# Altium PCB HandlebarTouchFPCB_LEFT_v1.2.PcbDoc
Units mm, origin at the board's own origin, x right, y up, seen from the top; angles counter-clockwise.
Board outline 211.72 x 83.52 mm, 2 copper layers (Top Layer, Bottom Layer); 5 components, 10 nets, 28 pads, 29 vias.
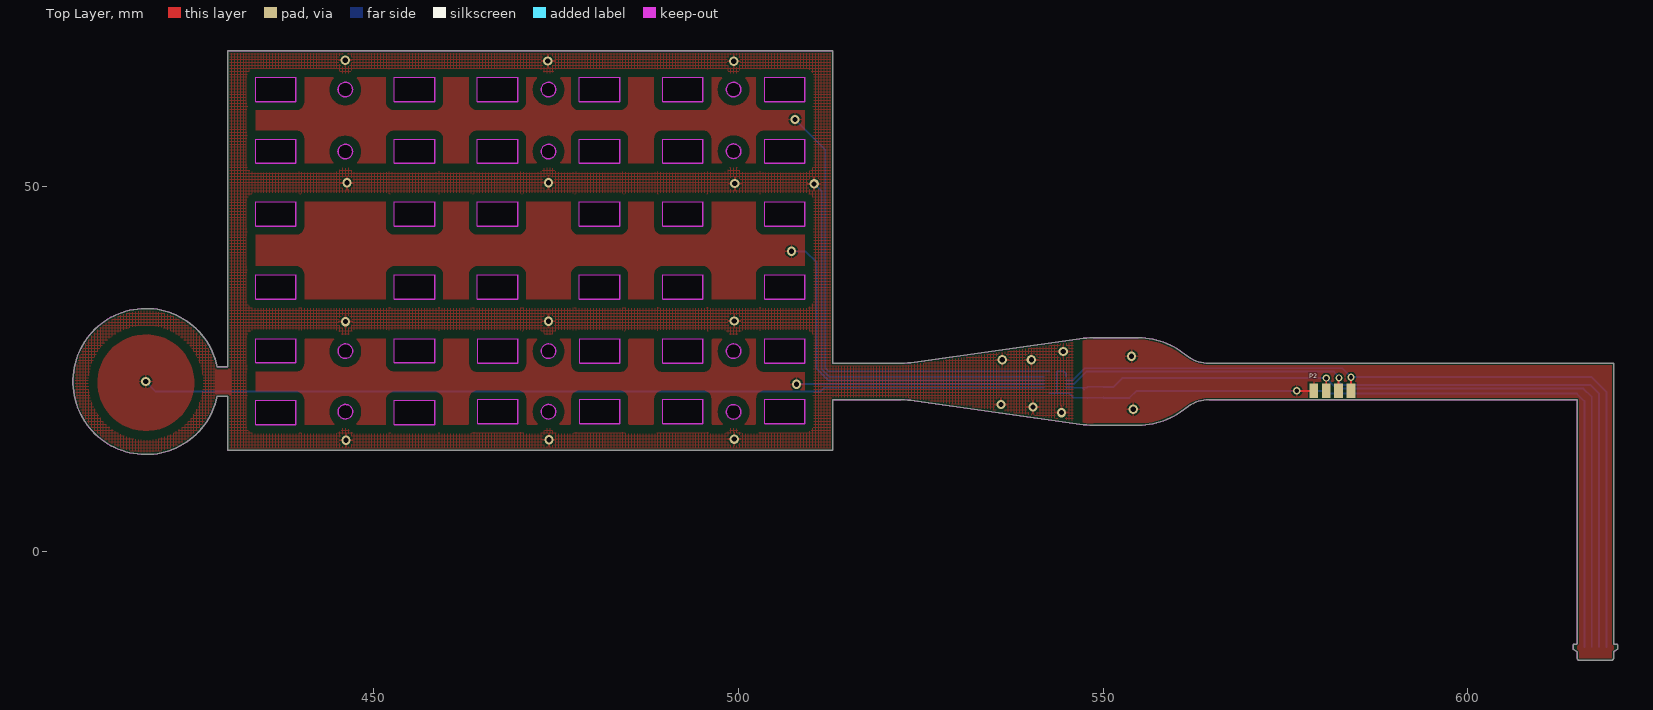
[diagram p0: Top Layer view]
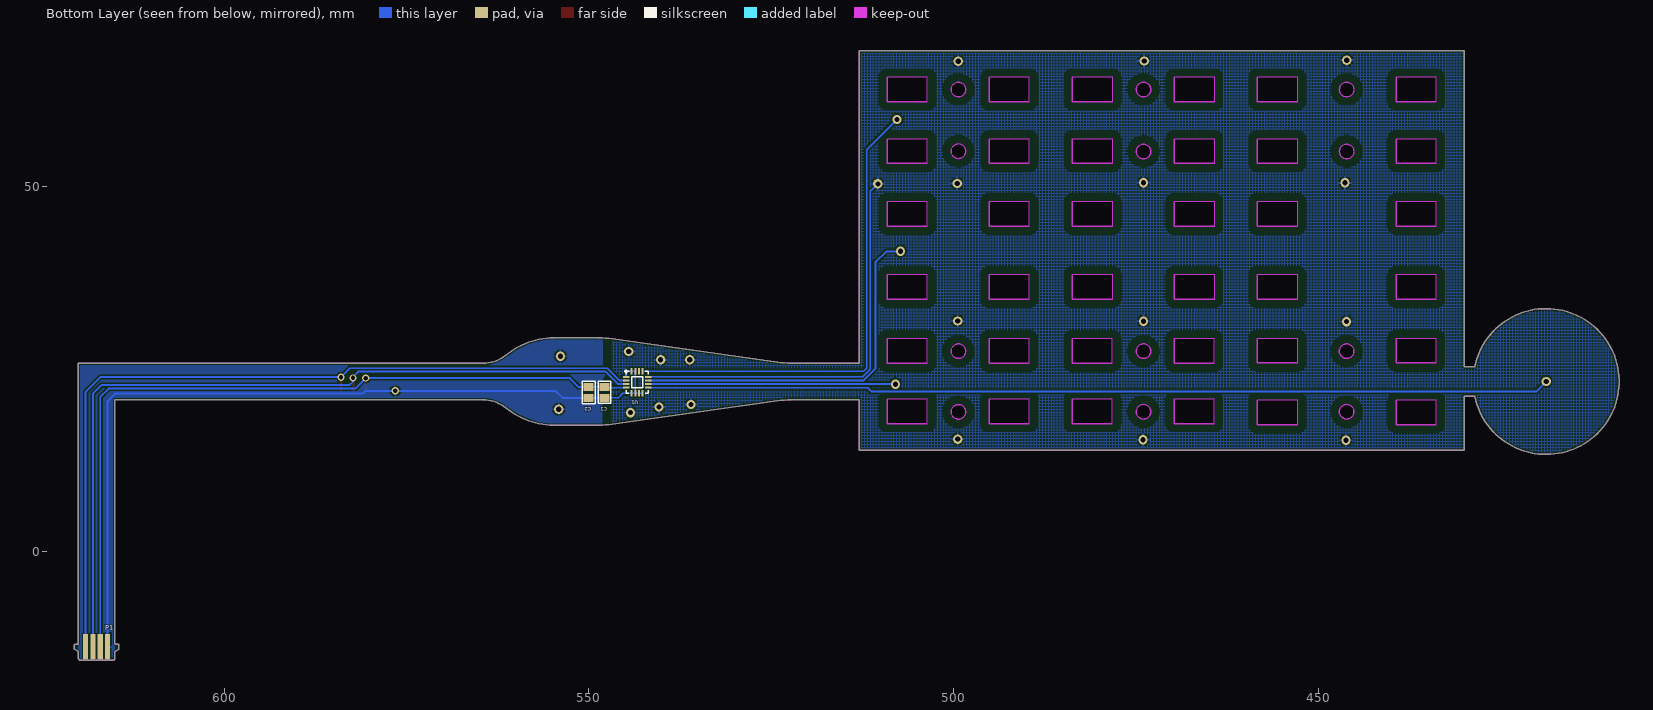
[diagram p1: Bottom Layer view, seen from below]

## Layer stack, top to bottom
Top Solder: solder mask 0.0102, Solder Resist, Dk 3.5
Top Layer: signal copper 0.0356
Dielectric 1: dielectric 0.32, FR-4, Dk 4.8
Bottom Layer: signal copper 0.0356
Bottom Solder: solder mask 0.0102, Solder Resist, Dk 3.5

## Board outline
619.963,-14.605 619.963,-13.805 cw(c620.113,-13.805) 620.039,-13.675 620.513,-13.405 620.513,-12.855 ccw(c620.363,-12.855) 620.363,-12.705 620.113,-12.705 cw(c620.113,-12.555) 619.963,-12.555 619.963,25.806 564.539,25.806 cw(c564.539,30.806) 561.672,26.71 560.546,27.498 ccw(c554.811,19.306) 554.811,29.306 548.66,29.306 ccw(c548.66,19.306) 547.273,29.209 523.653,25.902 cw(c522.267,35.806) 522.267,25.806 512.963,25.806 512.963,68.618 429.989,68.618 429.989,25.306 428.587,25.306 ccw(c418.789,23.306) 428.587,21.306 429.989,21.306 429.989,13.866 512.963,13.855 512.963,20.806 522.267,20.806 cw(c522.267,10.806) 523.653,20.709 547.273,17.402 ccw(c548.66,27.306) 548.66,17.306 554.811,17.306 ccw(c554.811,27.306) 560.546,19.113 561.672,19.902 cw(c564.539,15.806) 564.539,20.806 614.963,20.806 614.963,-12.555 cw(c614.813,-12.555) 614.813,-12.705 614.563,-12.705 ccw(c614.563,-12.855) 614.413,-12.855 614.413,-13.405 614.887,-13.675 cw(c614.813,-13.805) 614.963,-13.805 614.963,-14.605 ccw(c615.263,-14.605) 615.263,-14.905 619.663,-14.905 ccw(c619.663,-14.605)
cut-out: 500.349,19.145 cw(c499.349,19.145) 499.349,18.145 cw(c499.349,19.145) 498.349,19.145 cw(c499.349,19.145) 499.349,20.145 cw(c499.349,19.145)
cut-out: 500.349,27.465 cw(c499.349,27.465) 499.349,26.465 cw(c499.349,27.465) 498.349,27.465 cw(c499.349,27.465) 499.349,28.465 cw(c499.349,27.465)
cut-out: 500.349,54.867 cw(c499.349,54.867) 499.349,53.867 cw(c499.349,54.867) 498.349,54.867 cw(c499.349,54.867) 499.349,55.867 cw(c499.349,54.867)
cut-out: 500.349,63.324 cw(c499.349,63.324) 499.349,62.324 cw(c499.349,63.324) 498.349,63.324 cw(c499.349,63.324) 499.349,64.324 cw(c499.349,63.324)
cut-out: 474.982,19.163 cw(c473.982,19.163) 473.982,18.163 cw(c473.982,19.163) 472.982,19.163 cw(c473.982,19.163) 473.982,20.163 cw(c473.982,19.163)
cut-out: 474.982,27.465 cw(c473.982,27.465) 473.982,26.465 cw(c473.982,27.465) 472.982,27.465 cw(c473.982,27.465) 473.982,28.465 cw(c473.982,27.465)
cut-out: 474.982,54.826 cw(c473.982,54.826) 473.982,53.826 cw(c473.982,54.826) 472.982,54.826 cw(c473.982,54.826) 473.982,55.826 cw(c473.982,54.826)
cut-out: 474.982,63.324 cw(c473.982,63.324) 473.982,62.324 cw(c473.982,63.324) 472.982,63.324 cw(c473.982,63.324) 473.982,64.324 cw(c473.982,63.324)
cut-out: 447.132,19.163 cw(c446.132,19.163) 446.132,18.163 cw(c446.132,19.163) 445.132,19.163 cw(c446.132,19.163) 446.132,20.163 cw(c446.132,19.163)
cut-out: 447.132,27.465 cw(c446.132,27.465) 446.132,26.465 cw(c446.132,27.465) 445.132,27.465 cw(c446.132,27.465) 446.132,28.465 cw(c446.132,27.465)
cut-out: 447.126,54.826 cw(c446.126,54.826) 446.126,53.826 cw(c446.126,54.826) 445.126,54.826 cw(c446.126,54.826) 446.126,55.826 cw(c446.126,54.826)
cut-out: 447.126,63.324 cw(c446.126,63.324) 446.126,62.324 cw(c446.126,63.324) 445.126,63.324 cw(c446.126,63.324) 446.126,64.324 cw(c446.126,63.324)
cut-out: 509.102,17.527 503.602,17.527 503.602,20.882 509.102,20.882
cut-out: 509.102,25.787 503.602,25.787 503.602,29.142 509.102,29.142
cut-out: 509.084,34.6 503.584,34.6 503.584,37.927 509.084,37.927
cut-out: 509.084,44.6 503.584,44.6 503.584,47.927 509.084,47.927
cut-out: 509.084,53.2 503.584,53.2 503.584,56.527 509.084,56.527
cut-out: 509.084,61.66 503.584,61.66 503.584,64.987 509.084,64.987
cut-out: 495.143,17.527 489.643,17.527 489.643,20.882 495.143,20.882
cut-out: 495.143,25.787 489.643,25.787 489.643,29.142 495.143,29.142
cut-out: 495.114,34.6 489.614,34.6 489.614,37.927 495.114,37.927
cut-out: 495.114,44.6 489.614,44.6 489.614,47.927 495.114,47.927
cut-out: 495.114,53.2 489.614,53.2 489.614,56.527 495.114,56.527
cut-out: 495.114,61.66 489.614,61.66 489.614,64.987 495.114,64.987
cut-out: 483.732,17.527 478.232,17.527 478.232,20.882 483.732,20.882
cut-out: 483.732,25.787 478.232,25.787 478.232,29.142 483.732,29.142
cut-out: 483.714,34.6 478.214,34.6 478.214,37.927 483.714,37.927
cut-out: 483.714,44.6 478.214,44.6 478.214,47.927 483.714,47.927
cut-out: 483.714,53.2 478.214,53.2 478.214,56.527 483.714,56.527
cut-out: 483.714,61.66 478.214,61.66 478.214,64.987 483.714,64.987
cut-out: 469.773,17.527 464.273,17.527 464.273,20.882 469.773,20.882
cut-out: 469.773,25.787 464.273,25.787 464.273,29.142 469.773,29.142
cut-out: 469.744,34.6 464.244,34.6 464.244,37.927 469.744,37.927
cut-out: 469.744,44.6 464.244,44.6 464.244,47.927 469.744,47.927
cut-out: 469.744,53.2 464.244,53.2 464.244,56.527 469.744,56.527
cut-out: 469.744,61.66 464.244,61.66 464.244,64.987 469.744,64.987
cut-out: 458.364,17.4 452.864,17.4 452.864,20.727 458.364,20.727
cut-out: 458.364,25.86 452.864,25.86 452.864,29.187 458.364,29.187
cut-out: 458.364,34.6 452.864,34.6 452.864,37.927 458.364,37.927
cut-out: 458.364,44.6 452.864,44.6 452.864,47.927 458.364,47.927
cut-out: 458.364,53.2 452.864,53.2 452.864,56.527 458.364,56.527
cut-out: 458.364,61.66 452.864,61.66 452.864,64.987 458.364,64.987
cut-out: 439.344,17.4 433.844,17.4 433.844,20.727 439.344,20.727
cut-out: 439.344,25.86 433.844,25.86 433.844,29.187 439.344,29.187
cut-out: 439.344,34.6 433.844,34.6 433.844,37.927 439.344,37.927
cut-out: 439.344,44.6 433.844,44.6 433.844,47.927 439.344,47.927
cut-out: 439.344,53.2 433.844,53.2 433.844,56.527 439.344,56.527
cut-out: 439.344,61.66 433.844,61.66 433.844,64.987 439.344,64.987

## Design rules (kind name [scope] priority, off if disabled: settings)
Clearance Clearance_connector [InComponent('P1') vs OnLayer('Keep-Out Layer')] p1: gap=0 ignorepadtopadclearanceinfootprint=FALSE
Clearance [All] p2: gap=0.254 ignorepadtopadclearanceinfootprint=FALSE except(0: Arc-Hole Track-Hole SMDPad-Hole THPad-Hole Via-Hole Fill-Hole Poly-Hole Region-Hole Text-Hole; 0.203: Arc-Arc Arc-Track Arc-SMDPad Track-Track Track-SMDPad SMDPad-SMDPad SMDPad-THPad SMDPad-Via SMDPad-Fill SMDPad-Poly SMDPad-Region SMDPad-Text; 1.2: Fill-Fill Fill-Poly Fill-Region Poly-Poly Poly-Region Region-Region)
PolygonConnect [All] p1: connectstyle=Relief reliefconductorwidth=0.254 reliefentries=4 polygonreliefangle="90 Angle" airgapwidth=0.254
RoutingVias [All] p1: holewidth=0.711 width=1.27 viastyle="Through Hole" minholewidth=0.711 minwidth=1.27 maxholewidth=0.711 maxwidth=1.27
SolderMaskExpansion [All] p1: expansion=0.102
Width [All] p1: maxlimit=0.254 minlimit=0.254 preferedwidth=0.254
30 further rules are at their usual default settings.

## Components (designator, comment, footprint, x,y, rotation, side; value= is the part's Value field where it differs from the comment)
C1 "Cap" "CAP 0805 b" 547.853,21.819 r90 bottom value=0.1uF
C2 "Cap" "CAP 0805 b" 550.037,21.793 r90 bottom value=1uF
P1 "Header 4" FPCB_4_CONNECTOR 615.963,-13.067 r0 bottom
P2 "Header 4" 4PAD_CONNECTOR_SHORT 578.87,22.047 r0 top
U1 "CAP1298" "QFN-COL 16 (3x3)  V2" 543.382,23.204 r180 bottom

## Footprints (in the part's own frame and the unit in brackets; to place one, negate y for a bottom-side part, rotate by r counter-clockwise, add the part's x,y. Pads: shape width x height; smd on the part's side, far side on the other; paste and mask are expansions set on the pad)
4PAD_CONNECTOR_SHORT [mm]
  rect 1.2x2 smd: 1(0,0) 2(1.7,0) 3(3.4,0) 4(5.1,0)
"CAP 0805 b" [mm] "Chip Capacitor, Body 2.0x1.3mm, IPC High Density"
  rect 1.1x1.4 smd: 1(-0.75,0) 2(0.75,0)
  silkscreen extent -1.52,-0.89 1.52,0.89, body extent -1.03,-0.65 0.97,0.66, height 0.73
FPCB_4_CONNECTOR [mm]
  rect 0.7x3.5 smd: 1(0,0) 2(1,0) 3(2,0) 4(3,0)
"QFN-COL 16 (3x3)  V2" [mm] "PQFN, 16-Leads, Body 3.5x3.5mm, Pitch 0.5mm, NSC Recommended"
  rect 0.9x0.28 smd mask+0.051: 1(-1.5,0.75) 2(-1.5,0.25) 3(-1.5,-0.25) 4(-1.5,-0.75) 9(1.5,-0.75) 10(1.5,-0.25) 11(1.5,0.25) 12(1.5,0.75)
  rect 0.28x0.9 smd mask+0.051: 5(-0.75,-1.5) 6(-0.25,-1.5) 7(0.25,-1.5) 8(0.75,-1.5) 13(0.75,1.5) 14(0.25,1.5) 15(-0.25,1.5) 16(-0.75,1.5)
  silkscreen extent -1.65,-1.5 1.5,1.65, body extent -1.52,-1.52 1.52,1.52, height 1.1

## Part data
C1: library part "Cap Semi", "YAGEO (PHYCOMP)  CC0805KRX7R8BB104  COND, CERÁ MULT, X7R, 100NF, 25V, 0805", Supplier Part Number 1=644249, LatestRevisionDate=29-May-2009, LatestRevisionNote="IPC-7351 Footprint Added.", PackageDescription="Chip Capacitor", PackageReference=C1206, Published=8-Jun-2000, Publisher="Altium Limited", Supplier 1=Farnell
C2: library part "Cap Semi", "TAIYO YUDEN  TMK212BJ105KG-T  COND, CERÁ MULT, X5R, 1UF, 25V, 0805", Supplier Part Number 1=2112855, LatestRevisionDate=29-May-2009, LatestRevisionNote="IPC-7351 Footprint Added.", PackageDescription="Chip Capacitor", PackageReference=C1206, Published=8-Jun-2000, Publisher="Altium Limited", Supplier 1=Farnell
P1 P2: "Header, 4-Pin", LatestRevisionDate=17-Jul-2002, LatestRevisionNote="Re-released for DXP Platform.", Publisher="Altium Limited"
U1: Supplier Part Number 1=2373292, Supplier 1=Farnell

## Via types
v1: diameter 1.27, hole 0.711, Top Layer to Bottom Layer, 25 vias
v2: diameter 1, hole 0.6, Top Layer to Bottom Layer, 4 vias

## Nets (pads, with @x,y where several pads share a name; then routed paths per layer and width w, separated by ;. In a path a pad name is that pad's centre, name@x,y a point inside that pad or via, vN(x,y) a via of type N, cw(c..) or ccw(c..) an arc to the next point about the centre after c; other vN are vias at no path point)
5V: C1.2 C2.2 P1.2 P2.2 U1.4 | length 110.1
  Top Layer w0.254: v2(580.568,23.774) 580.568,22.1 580.542,22.074 P2.2
  Bottom Layer w0.254: U1.4 C1.2@547.155,22.454 ; C1.2@547.395,22.213 C1.2@547.155,22.454 ; C2.2 551.371,22.543 552.602,23.774 v2(580.568,23.774) 582.016,22.327 615.823,22.327 616.963,21.186 P1.2 ; C2.2@550.037,22.594 547.915,22.594 547.775,22.454 C1.2@547.155,22.454
GND: C1.1 C2.1 P1.1 P2.1 U1.1 U1.5 U1.6 U1.7 U1.8 U1.15 U1.16 | length 115.4
  Top Layer w0.254: v2(576.529,22.022) 578.844,22.022 P2.1
  Bottom Layer w0.254: U1.8 U1.7 U1.6 ; U1.1 544.882,24.433 544.612,24.704 U1.16 U1.15 U1.6 ; C2.1 553.605,21.043 554.584,22.022 v2(576.529,22.022) 580.593,22.022 580.974,21.641 614.934,21.641 615.963,20.612 P1.1 ; C2.1@550.036,21.094 C1.1 545.936,21.094 545.326,21.704 U1.5 U1.6
  other v1: 554.126,19.495 553.898,26.772
Pad_1: U1.9 | length 123.9
  Bottom Layer w0.254: v1(418.789,23.306) 420.174,21.92 511.239,21.92 511.773,22.454 U1.9
Pad_2: U1.10 | length 33.9
  Bottom Layer w0.254: v1(507.975,22.936) 507.992,22.954 U1.10
Pad_3: U1.11 | length 50.5
  Bottom Layer w0.254: v1(507.289,41.148) 509.194,41.148 510.718,39.624 510.718,25.047 512.311,23.454 U1.11
Pad_4: U1.13 | length 66.7
  Bottom Layer w0.254: v1(507.771,59.207) 511.912,55.067 511.912,25.146 512.354,24.704 U1.13
Pad_5: U1.14
SCL: P1.3 P2.3 U1.3 | length 112
  Top Layer w0.254: P2.3 v2@582.27,23.978
  Bottom Layer w0.254: U1.3 545.991,22.954 547.692,24.655 581.617,24.655 582.32,23.952 v2(582.32,23.8) 582.32,23.292 582.778,22.835 616.737,22.835 617.963,21.609 P1.3
SDA: P1.4 P2.4 U1.2 | length 112.9
  Top Layer w0.254: P2.4 583.946,22.071 583.971,22.096 v2(583.971,23.901)
  Bottom Layer w0.254: U1.2 545.83,23.454 547.489,25.113 582.76,25.113 v2(583.971,23.901) 616.966,23.901 618.963,21.904 P1.4
SignalGuard: U1.12 | length 56.7
  Bottom Layer w0.254: v1(510.388,50.394) 511.429,49.352 511.429,24.982 512.457,23.954 U1.12
  other v1: 446.227,15.254 474.04,15.33 499.44,15.406 544.297,19.038 540.393,19.8 535.993,20.156 536.169,26.277 540.156,26.277 544.525,27.42 446.151,31.51 473.989,31.56 499.44,31.611 499.516,50.433 446.354,50.534 473.989,50.56 499.364,67.199 473.888,67.247 446.126,67.349

## Polygon pours and split planes (outlines as drawn)
SignalGuard on Bottom Layer "Bottom Layer-SignalGuard 1" (hatched 90Degree grid 0.4 track 0.1, pour order 28): 419.464,33.333 cw(c418.58,23.217) 428.012,19.457 cw(c418.819,23.491) 411.639,16.475 cw(c419.025,23.292)
SignalGuard on Bottom Layer "Bottom Layer-SignalGuard" (hatched 90Degree grid 0.4 track 0.1, pour order 26): 512.963,25.806 512.963,68.618 429.989,68.618 429.989,25.306 428.587,25.306 428.587,21.306 429.989,21.306 429.989,13.866 435.813,13.865 512.952,13.866 513.06,20.709 522.963,20.806 546.932,17.456 546.811,29.145 523.44,25.907
no net on Bottom Layer "Top Layer-No Net 1" (solid, pour order 4): 450.672,8.726
SignalGuard on Bottom Layer "Top Layer-SignalGuard 1" (hatched 90Degree grid 0.4 track 0.1, pour order 20): 432.719,25.199 432.742,25.176 432.742,21.333 426.558,21.333 426.542,21.317 426.542,25.199
no net on Bottom Layer "Top Layer-No Net" (solid, pour order 32): 619.836,0.852
GND on Bottom Layer "Top Layer-GND" (solid, pour order 36): 619.963,-14.905 619.963,1.993 619.963,2.337 619.963,2.574 619.963,2.794 619.963,3.006 619.963,3.156 619.963,25.806 563.767,25.806 562.046,26.448 559.661,28.051 558.658,28.536 557.603,28.908 556.491,29.164 555.346,29.306 547.963,29.306 546.049,28.959 546.049,17.792 546.049,17.59 547.78,17.325 550.415,17.268 554.939,17.307 556.363,17.427 557.098,17.59 557.78,17.792 559.401,18.421 561.446,19.744 561.747,19.977 561.978,20.1 562.203,20.233 562.512,20.376 563.067,20.613 563.975,20.806 614.963,20.806 614.963,3.156 614.963,2.921 614.963,2.769 614.963,2.515 614.963,2.181 614.963,1.924 614.963,-14.905
SignalGuard on Top Layer (solid, pour order 38): 428.193,24.943 428.311,24.825 428.311,21.448 430.378,21.448 430.454,21.525 430.454,24.968
SignalGuard on Top Layer "Top Layer-SignalGuard" (hatched 90Degree grid 0.4 track 0.1, pour order 24): 545.668,28.985 545.922,28.731 545.922,17.546 523.556,20.806 510.363,20.664 510.363,25.806 522.963,25.806
SignalGuard on Top Layer "Top Layer-SignalGuard 2" (hatched 90Degree grid 0.4 track 0.1, pour order 18): 409.524,19.521 cw(c418.737,23.34) 427.95,27.159 cw(c418.737,23.34)
SignalGuard on Top Layer "Top Layer-SignalGuard 3" (hatched 90Degree grid 0.4 track 0.1, pour order 16): 512.963,68.618 512.963,13.855 512.952,13.866 429.989,13.866 429.989,68.618
Pad_1 on Top Layer "Top Layer-Pad_4" (solid, pour order 14): 412.572,20.918 cw(c418.795,23.142) 425.018,25.365 cw(c418.795,23.142)
Pad_4 on Top Layer "Top Layer-Pad_1" (solid, pour order 8): 509.084,64.987 509.084,53.2 433.844,53.2 433.844,64.987
Pad_3 on Top Layer "Top Layer-Pad_2" (solid, pour order 6): 509.084,47.927 509.084,34.6 433.844,34.6 433.844,47.927
Pad_2 on Top Layer "Top Layer-Pad_3" (solid, pour order 2): 509.102,29.142 509.102,17.527 508.975,17.4 433.844,17.4 433.844,29.187
GND on Top Layer "Bottom Layer-GND" (solid, remove dead copper, pour order 30): 619.963,-14.905 619.963,1.993 619.963,2.261 619.963,2.574 619.963,2.819 619.963,3.006 619.963,3.156 619.963,25.806 563.767,25.806 562.046,26.448 559.661,28.051 558.658,28.536 557.603,28.908 556.491,29.164 555.346,29.306 547.963,29.306 546.049,28.959 546.049,17.792 546.049,17.59 547.78,17.325 550.415,17.268 554.939,17.307 556.363,17.427 557.098,17.59 557.78,17.792 559.401,18.421 561.446,19.744 561.747,19.977 561.978,20.1 562.203,20.233 562.512,20.376 563.067,20.613 563.975,20.806 614.963,20.806 614.963,3.156 614.963,3.006 614.963,2.692 614.962,2.464 614.961,2.235 614.963,1.96 614.963,-14.905 616.763,-14.905

## Keep-outs
Keep-Out Layer:
  circle w0.013: c446.126,54.826 r1
  circle w0.013: c473.982,27.465 r1
  circle w0.013: c499.349,27.465 r1
  circle w0.013: c473.982,54.826 r1
  circle w0.013: c473.982,63.324 r1
  circle w0.013: c499.349,19.145 r1
  circle w0.013: c499.349,63.324 r1
  circle w0.013: c446.126,63.324 r1
  circle w0.013: c473.982,19.163 r1
  circle w0.013: c499.349,54.867 r1
  circle w0.013: c446.132,27.465 r1
  circle w0.013: c446.132,19.163 r1
  lines w0.013: 428.587,21.306 cw(c418.789,23.306) 428.587,25.306 429.989,25.306 429.989,68.618 512.963,68.618 512.963,25.806 522.267,25.806 ccw(c522.267,35.806) 523.653,25.902 547.273,29.209 cw(c548.66,19.306) 548.66,29.306 554.811,29.306 cw(c554.811,19.306) 560.546,27.498 561.672,26.71 ccw(c564.539,30.806) 564.539,25.806 619.963,25.806 619.963,-12.555 ccw(c620.113,-12.555) 620.113,-12.705 620.363,-12.705 cw(c620.363,-12.855) 620.513,-12.855 620.513,-13.405 620.039,-13.675 ccw(c620.113,-13.805) 619.963,-13.805 619.963,-14.605 cw(c619.663,-14.605) 619.663,-14.905 615.263,-14.905 cw(c615.263,-14.605) 614.963,-14.605 614.963,-13.805 ccw(c614.813,-13.805) 614.887,-13.675 614.413,-13.405 614.413,-12.855 cw(c614.563,-12.855) 614.563,-12.705 614.813,-12.705 ccw(c614.813,-12.555) 614.963,-12.555 614.963,20.806 564.539,20.806 ccw(c564.539,15.806) 561.672,19.902 560.546,19.113 cw(c554.811,27.306) 554.811,17.306 548.66,17.306 cw(c548.66,27.306) 547.273,17.402 523.653,20.709 ccw(c522.267,10.806) 522.267,20.806 512.963,20.806 512.963,13.855 429.989,13.866 429.989,21.306 428.587,21.306 ; 433.844,17.4 433.844,20.727 439.344,20.727 439.344,17.4 433.844,17.4 ; 433.844,25.86 433.844,29.187 439.344,29.187 439.344,25.86 433.844,25.86 ; 433.844,34.6 433.844,37.927 439.344,37.927 439.344,34.6 433.844,34.6 ; 433.844,44.6 433.844,47.927 439.344,47.927 439.344,44.6 433.844,44.6 ; 433.844,53.2 439.344,53.2 439.344,56.527 433.844,56.527 433.844,53.2 ; 433.844,61.66 439.344,61.66 439.344,64.987 433.844,64.987 433.844,61.66 ; 452.864,17.4 452.864,20.727 458.364,20.727 458.364,17.4 452.864,17.4 ; 452.864,25.86 452.864,29.187 458.364,29.187 458.364,25.86 452.864,25.86 ; 452.864,34.6 452.864,37.927 458.364,37.927 458.364,34.6 452.864,34.6 ; 452.864,44.6 452.864,47.927 458.364,47.927 458.364,44.6 452.864,44.6 ; 452.864,53.2 452.864,56.527 458.364,56.527 458.364,53.2 452.864,53.2 ; 452.864,61.66 452.864,64.987 458.364,64.987 458.364,61.66 452.864,61.66 ; 464.244,34.6 464.244,37.927 469.744,37.927 469.744,34.6 464.244,34.6 ; 464.244,44.6 464.244,47.927 469.744,47.927 469.744,44.6 464.244,44.6 ; 464.244,53.2 469.744,53.2 469.744,56.527 464.244,56.527 464.244,53.2 ; 464.244,61.66 469.744,61.66 469.744,64.987 464.244,64.987 464.244,61.66 ; 464.273,17.527 464.273,20.882 469.773,20.882 469.773,17.527 464.273,17.527 ; 464.273,25.787 464.273,29.142 469.773,29.142 469.773,25.787 464.273,25.787 ; 478.214,34.6 478.214,37.927 483.714,37.927 483.714,34.6 478.214,34.6 ; 478.214,44.6 478.214,47.927 483.714,47.927 483.714,44.6 478.214,44.6 ; 478.214,53.2 483.714,53.2 483.714,56.527 478.214,56.527 478.214,53.2 ; 478.214,61.66 483.714,61.66 483.714,64.987 478.214,64.987 478.214,61.66 ; 478.232,17.527 478.232,20.882 483.732,20.882 483.732,17.527 478.232,17.527 ; 478.232,25.787 478.232,29.142 483.732,29.142 483.732,25.787 478.232,25.787 ; 489.614,34.6 489.614,37.927 495.114,37.927 495.114,34.6 489.614,34.6 ; 489.614,44.6 489.614,47.927 495.114,47.927 495.114,44.6 489.614,44.6 ; 489.614,53.2 495.114,53.2 495.114,56.527 489.614,56.527 489.614,53.2 ; 489.614,61.66 489.614,64.987 495.114,64.987 495.114,61.66 489.614,61.66 ; 489.643,17.527 489.643,20.882 495.143,20.882 495.143,17.527 489.643,17.527 ; 489.643,25.787 489.643,29.142 495.143,29.142 495.143,25.787 489.643,25.787 ; 503.584,34.6 503.584,37.927 509.084,37.927 509.084,34.6 503.584,34.6 ; 503.584,44.6 503.584,47.927 509.084,47.927 509.084,44.6 503.584,44.6 ; 503.584,53.2 509.084,53.2 509.084,56.527 503.584,56.527 503.584,53.2 ; 503.584,61.66 503.584,64.987 509.084,64.987 509.084,61.66 503.584,61.66 ; 503.602,17.527 503.602,20.882 509.102,20.882 509.102,17.527 503.602,17.527 ; 503.602,25.787 503.602,29.142 509.102,29.142 509.102,25.787 503.602,25.787